# EAGLE board Pro Trinket Keyboard V3.3 (EAGLE 7.3.0)
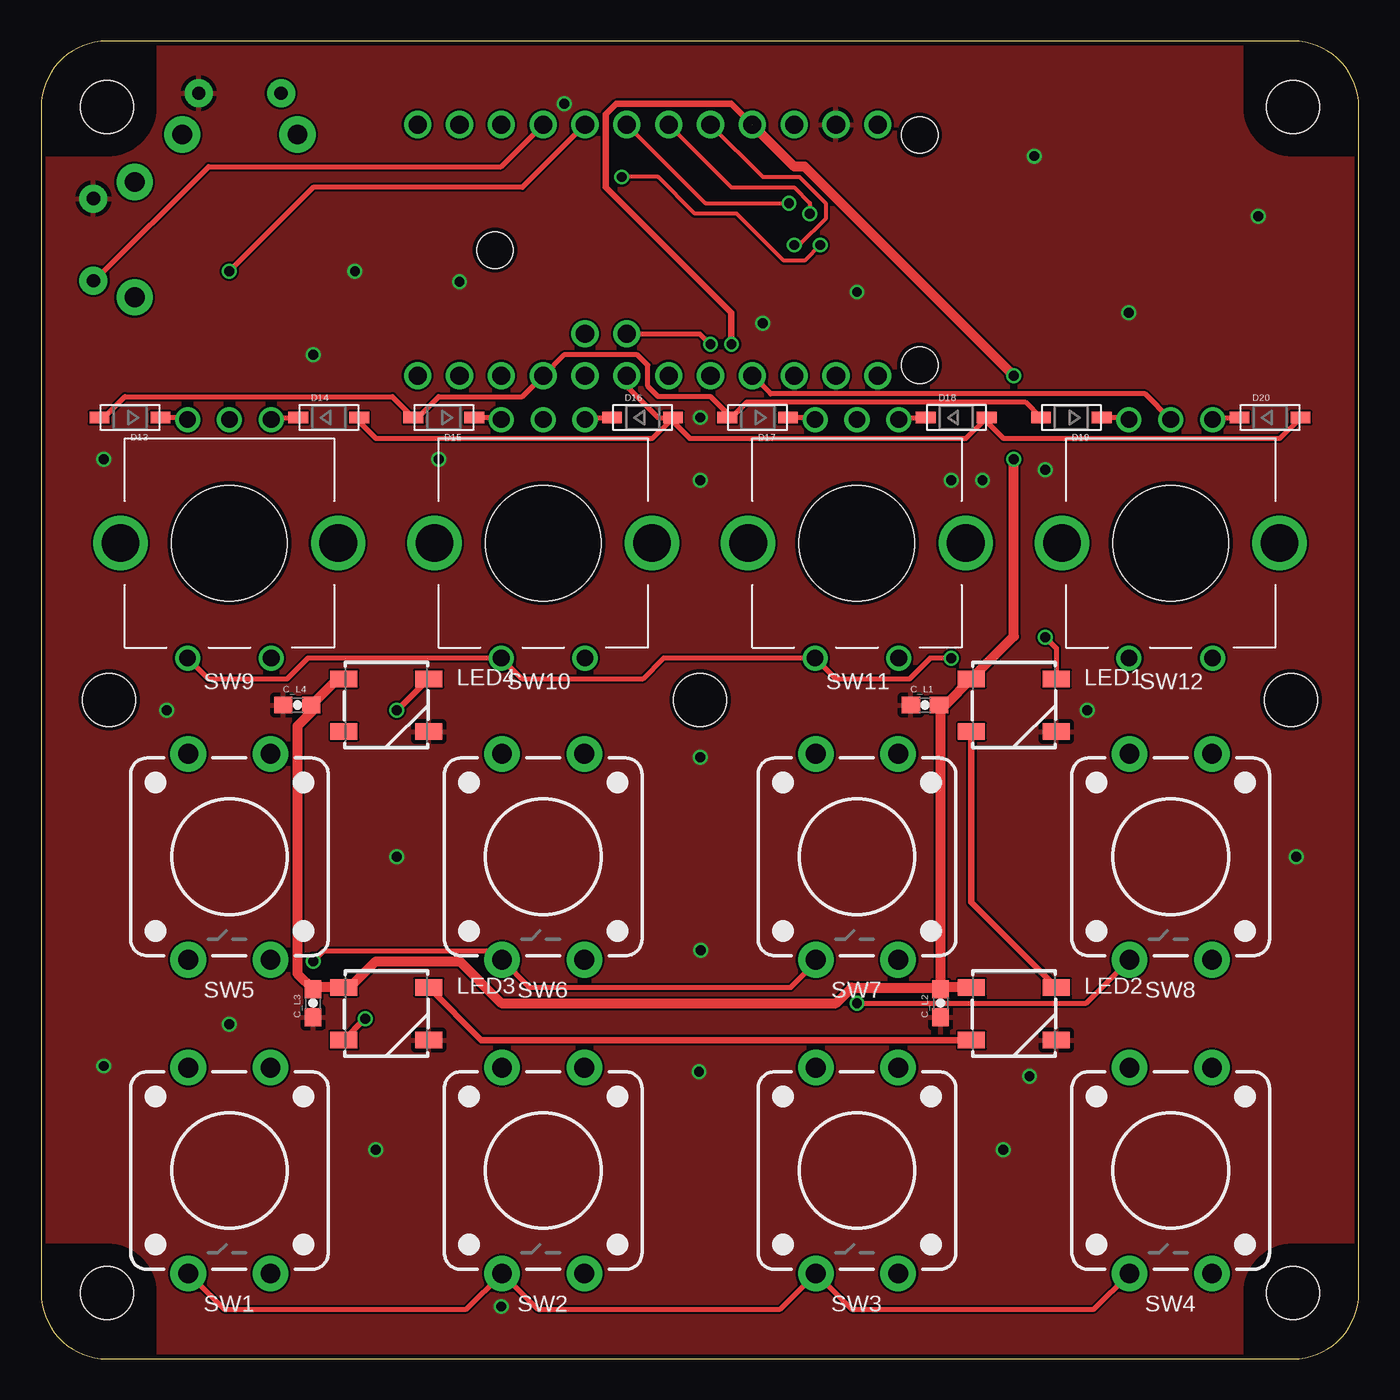
[diagram p0: board, top side]
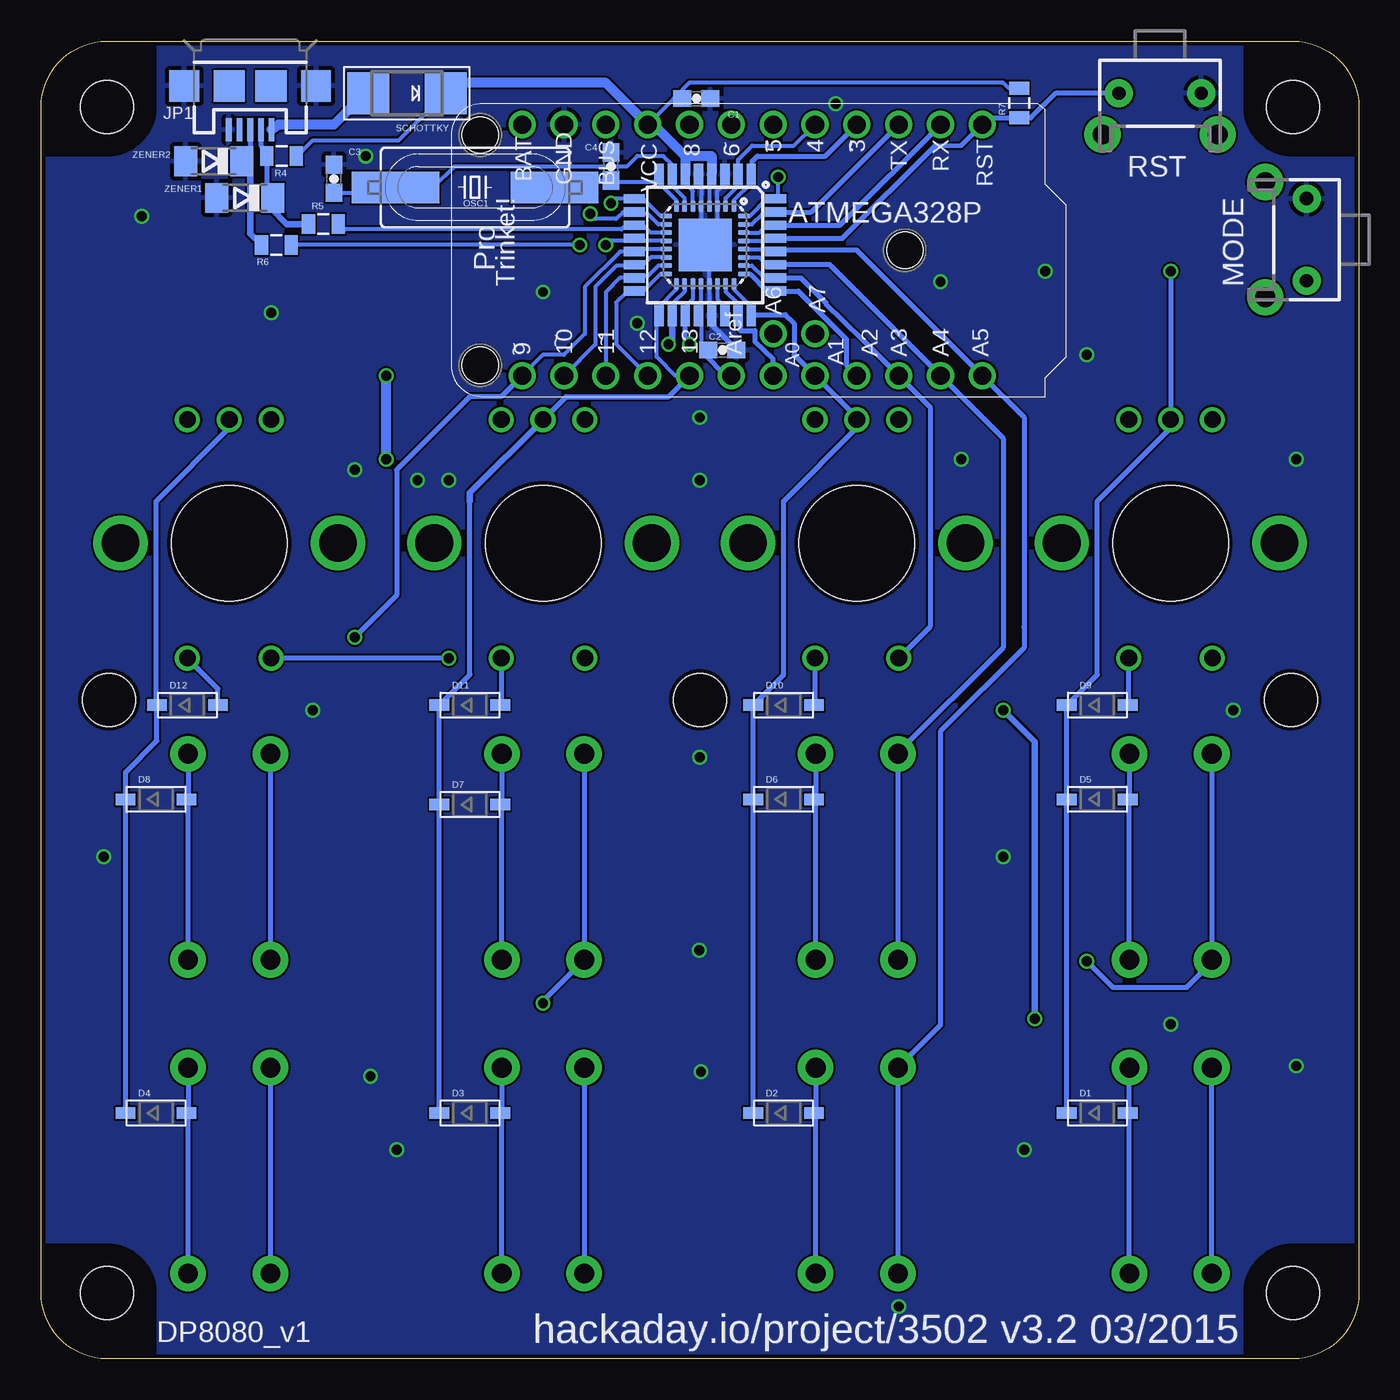
[diagram p1: board, bottom side, seen from below]

Size 80 x 80 mm. Coordinates in mm from the lower left corner, seen from the top.
Copper layers (1*16): Top 0.035mm / dielectric 1.5mm / Bottom 0.035mm
Design rules "dirt_cheap_dirty_boards.v1": minimum track width 5mil, minimum drill 12mil, track to track 5mil, track to pad 5mil, pad to pad 5mil, via to via 5mil, smd to smd 0mil, copper to edge 10mil, drill to drill 10mil, minimum pad ring 10mil, minimum via ring 6mil, stop-mask expansion 2mil, vias tented up to drill 25mil, thermal gap 10mil
Holes 7 mm at 11.43,49.53 30.48,49.53 49.53,49.53 68.58,49.53
Holes 3.2 mm at 40.01,40.01 4.13,40.01 75.88,40.01

## Footprints (pad centres in the part's own frame; a part is rotated, then mirrored left to right if it is on the bottom)
MLF32-PAD = smd 0.7 x 0.3: 1 -2.35,1.75; 2 -2.35,1.25; 3 -2.35,0.75; 4 -2.35,0.25; 5 -2.35,-0.25; 6 -2.35,-0.75; 7 -2.35,-1.25; 8 -2.35,-1.75; 17 2.35,-1.75; 18 2.35,-1.25; 19 2.35,-0.75; 20 2.35,-0.25; 21 2.35,0.25; 22 2.35,0.75; 23 2.35,1.25; 24 2.35,1.75 | smd 0.3 x 0.7: 9 -1.75,-2.35; 10 -1.25,-2.35; 11 -0.75,-2.35; 12 -0.25,-2.35; 13 0.25,-2.35; 14 0.75,-2.35; 15 1.25,-2.35; 16 1.75,-2.35; 25 1.75,2.35; 26 1.25,2.35; 27 0.75,2.35; 28 0.25,2.35; 29 -0.25,2.35; 30 -0.75,2.35; 31 -1.25,2.35; 32 -1.75,2.35 | smd 3.2 x 3.2: PAD 0,0
TQFP32-08 = smd 1.27 x 0.559: 1 -4.293,2.8; 2 -4.293,2; 3 -4.293,1.2; 4 -4.293,0.4; 5 -4.293,-0.4; 6 -4.293,-1.2; 7 -4.293,-2; 8 -4.293,-2.8; 17 4.293,-2.8; 18 4.293,-2; 19 4.293,-1.2; 20 4.293,-0.4; 21 4.293,0.4; 22 4.293,1.2; 23 4.293,2; 24 4.293,2.8 | smd 0.559 x 1.27: 9 -2.8,-4.293; 10 -2,-4.293; 11 -1.2,-4.293; 12 -0.4,-4.293; 13 0.4,-4.293; 14 1.2,-4.293; 15 2,-4.293; 16 2.8,-4.293; 25 2.8,4.293; 26 2,4.293; 27 1.2,4.293; 28 0.4,4.293; 29 -0.4,4.293; 30 -1.2,4.293; 31 -2,4.293; 32 -2.8,4.293
0603-CAP = smd 1.1 x 1: 1 -0.85,0; 2 0.85,0
SOD-123 = smd 1.2 x 0.7: A 1.85,0; C -1.85,0
USB-MICROB = smd 0.35 x 1.4: D+ 0,2.65; D- -0.65,2.65; GND 1.3,2.65; ID 0.65,2.65; VBUS -1.3,2.65 | smd 1.8 x 1.9: MT1 -4,0; MT2 4,0 | smd 1.9 x 1.9: P$1 -1.27,0; P$2 1.27,0
WS2812B = smd 1.651 x 1: 1 -2.577,1.6; 2 -2.577,-1.6; 3 2.577,-1.6; 4 2.577,1.6
TACTILE-PTH-SIDEEZ = drill 0.8 pad 1.7: 1 -2.5,0; 2 2.5,0 | drill 1.2 pad 2.2: ANCHOR1 -3.5,2.5; ANCHOR2 3.5,2.5
HC-49U = smd 5.334 x 1.93: 1 -4.826,0; 2 4.826,0
0805 = smd 0.8 x 1.2: 1 -0.9,0; 2 0.9,0
TACTILE-PTH-12MM = drill 1.2 pad 2.159: 1 6.25,-2.5; 2 -6.25,-2.5; 3 6.25,2.5; 4 -6.25,2.5
SMADIODE = smd 2.54 x 2.54: A 2.349,0; C -2.349,0
ROTARY_ENC_PLAIN = drill 1.016: A 7.493,-2.54; B 7.493,2.54; C 7.493,0; SW+ -6.985,2.54; SW- -6.985,-2.54 | drill 2.286: P$3 0,6.604; P$4 0,-6.604
DP8080_V1 = hole 3.2: 4,4; 76,4; 76,76; 4,76
PROTRINKET = drill 1.1: 3 7.62,2.921; 4 7.62,5.461; 5 7.62,8.001; 6 7.62,10.541; 8 7.62,13.081; 9 -7.62,23.241; 10 -7.62,20.701; 11 -7.62,18.161; 12 -7.62,15.621; 13 -7.62,13.081; A0 -7.62,8.001; A1 -7.62,5.461; A2 -7.62,2.921; A3 -7.62,0.381; A4 -7.62,-2.159; A5 -7.62,-4.699; A6 -5.08,8.001; A7 -5.08,5.461; AREF -7.62,10.541; BAT+ 7.62,23.241; GND 7.62,20.701; RST 7.62,-4.699; RX 7.62,-2.159; TX 7.62,0.381; USB 7.62,18.161; VCC 7.62,15.621 | hole 2.2: -6.985,25.781; 6.985,25.781; 0,0
SOD80C = smd 1.4 x 1.8: A 1.7,0; C -1.7,0

## Placement (x,y rotation side)
ATMEGA328P  [MLF32-PAD]  39.69,67.63 270 bottom
ATMEGA328P_TQFP  [TQFP32-08]  39.69,67.63 270 bottom
C1  10uF  [0603-CAP]  40.23,76.52 180 bottom
C2  0.1uF  [0603-CAP]  38.64,61.25 180 bottom
C3  22pF  [0603-CAP]  62.23,71.65 270 bottom
C4  22pF  [0603-CAP]  45.4,72.39 90 bottom
C_L1  0.1uF  [0603-CAP]  53.66,39.69 0 top
C_L2  0.1uF  [0603-CAP]  54.61,21.59 90 top
C_L3  0.1uF  [0603-CAP]  16.51,21.59 90 top
C_L4  0.1uF  [0603-CAP]  15.56,39.69 0 top
D1  [SOD-123]  15.88,14.92 0 bottom
D2  [SOD-123]  34.92,14.92 0 bottom
D3  [SOD-123]  53.98,14.92 0 bottom
D4  [SOD-123]  73.03,14.92 0 bottom
D5  [SOD-123]  15.88,33.97 0 bottom
D6  [SOD-123]  34.92,33.97 0 bottom
D7  [SOD-123]  53.98,33.66 0 bottom
D8  [SOD-123]  73.03,33.97 0 bottom
D9  [SOD-123]  15.88,39.69 0 bottom
D10  [SOD-123]  34.92,39.69 0 bottom
D11  [SOD-123]  53.98,39.69 0 bottom
D12  [SOD-123]  71.12,39.69 0 bottom
D13  [SOD-123]  5.4,57.15 180 top
D14  [SOD-123]  17.46,57.15 0 top
D15  [SOD-123]  24.45,57.15 180 top
D16  [SOD-123]  36.51,57.15 0 top
D17  [SOD-123]  43.5,57.15 180 top
D18  [SOD-123]  55.56,57.15 0 top
D19  [SOD-123]  62.55,57.15 180 top
D20  [SOD-123]  74.61,57.15 0 top
JP1  USB-MICROB  [USB-MICROB]  67.31,77.28 180 bottom
LED1  [WS2812B]  59.05,39.69 0 top
LED2  [WS2812B]  59.05,20.95 0 top
LED3  [WS2812B]  20.95,20.95 0 top
LED4  [WS2812B]  20.95,39.69 0 top
MODE  [TACTILE-PTH-SIDEEZ]  3.17,67.94 90 bottom
OSC1  16MHz  [HC-49U]  53.66,71.12 180 bottom
R4  1.5k  [0805]  65.41,73.03 0 bottom
R5  68  [0805]  62.87,68.9 0 bottom
R6  68  [0805]  65.72,67.63 0 bottom
R7  10k  [0805]  20.62,76.24 90 bottom
RST  [TACTILE-PTH-SIDEEZ]  12.06,76.83 180 bottom
S1  [TACTILE-PTH-12MM]  11.43,11.43 270 top
S2  [TACTILE-PTH-12MM]  30.48,11.43 270 top
S3  [TACTILE-PTH-12MM]  49.53,11.43 270 top
S4  [TACTILE-PTH-12MM]  68.58,11.43 270 top
S5  [TACTILE-PTH-12MM]  11.43,30.48 270 top
S6  [TACTILE-PTH-12MM]  30.48,30.48 270 top
S7  [TACTILE-PTH-12MM]  49.53,30.48 270 top
S8  [TACTILE-PTH-12MM]  68.58,30.48 270 top
SCHOTTKY  [SMADIODE]  57.78,76.83 180 bottom
SW9  ROTARTY_ENCODER  [ROTARY_ENC_PLAIN]  11.43,49.53 90 top
SW10  ROTARTY_ENCODER  [ROTARY_ENC_PLAIN]  30.48,49.53 90 top
SW11  ROTARTY_ENCODER  [ROTARY_ENC_PLAIN]  49.53,49.53 90 top
SW12  ROTARTY_ENCODER  [ROTARY_ENC_PLAIN]  68.58,49.53 90 top
U$1  [DP8080_V1]  0,0 0 top
U$2  PRO_TRINKET  [PROTRINKET]  27.56,67.32 90 bottom
ZENER1  3.6V  [SOD80C]  67.63,70.48 180 bottom
ZENER2  3.6V  [SOD80C]  69.53,72.71 180 bottom

## Library data of the parts
ATMEGA328P = SparkFun-DigitalIC
ATMEGA328P_TQFP = SparkFun-DigitalIC; PROD_ID: IC-09069
C1 = SparkFun-Capacitors; PROD_ID: CAP-11015
C2-C4 C_L1-C_L4 = SparkFun-Capacitors; PROD_ID: CAP-07876
D1-D20 SCHOTTKY U$2 = adafruit
JP1 = SparkFun-Connectors; PROD_ID: CONN-09505
LED1-LED4 = SparkFun-LED
MODE RST SW9-SW12 = SparkFun-Electromechanical
OSC1 = dp_devices
R4-R7 = SparkFun-Passives
S1-S8 = SparkFun-Electromechanical; PROD_ID: SWCH-09185
U$1 = dp_pcb
ZENER1 ZENER2 = diode

## Nets
A0/D14: ATMEGA328P.23 ATMEGA328P_TQFP.23 D14.A D16.A D18.A D20.A U$2.A0
A1/D15: ATMEGA328P.24 ATMEGA328P_TQFP.24 D2.C D6.C D10.C SW10.C U$2.A1
A2/D16: ATMEGA328P.25 ATMEGA328P_TQFP.25 D13.A D15.A D17.A D19.A U$2.A2
A3/D17: ATMEGA328P.26 ATMEGA328P_TQFP.26 SW9.SW+ SW10.SW+ SW11.SW+ SW12.SW+ U$2.A3
A4/D18: ATMEGA328P.27 ATMEGA328P_TQFP.27 S5.1 S5.2 S6.1 S6.2 S7.1 S7.2 S8.1 S8.2 U$2.A4
A5/D19: ATMEGA328P.28 ATMEGA328P_TQFP.28 S1.1 S1.2 S2.1 S2.2 S3.1 S3.2 S4.1 S4.2 U$2.A5
A6: ATMEGA328P.19 ATMEGA328P_TQFP.19 U$2.A6
A7: ATMEGA328P.22 ATMEGA328P_TQFP.22
AREF: ATMEGA328P.20 ATMEGA328P_TQFP.20 C2.2 U$2.AREF
BAT+: U$2.BAT+
D2/D+: ATMEGA328P.32 ATMEGA328P_TQFP.32 R6.2
D3: ATMEGA328P.1 ATMEGA328P_TQFP.1 MODE.1 U$2.3
D4: ATMEGA328P.2 ATMEGA328P_TQFP.2 D1.C D5.C D9.C SW9.C U$2.4
D5: ATMEGA328P.9 ATMEGA328P_TQFP.9 U$2.5
D6: ATMEGA328P.10 ATMEGA328P_TQFP.10 U$2.6
D7/D-: ATMEGA328P.11 ATMEGA328P_TQFP.11 R5.2
D8: ATMEGA328P.12 ATMEGA328P_TQFP.12 U$2.8
D9: ATMEGA328P.13 ATMEGA328P_TQFP.13 LED1.4 U$2.9
D10: ATMEGA328P.14 ATMEGA328P_TQFP.14 U$2.10
D11: ATMEGA328P.15 ATMEGA328P_TQFP.15 U$2.11
D12: ATMEGA328P.16 ATMEGA328P_TQFP.16 D4.C D8.C D12.C SW12.C U$2.12
D13: ATMEGA328P.17 ATMEGA328P_TQFP.17 D3.C D7.C D11.C SW11.C U$2.13
GND: ATMEGA328P.3 ATMEGA328P.5 ATMEGA328P.21 ATMEGA328P.PAD ATMEGA328P_TQFP.3 ATMEGA328P_TQFP.5 ATMEGA328P_TQFP.21 C1.1 C2.1 C3.1 C4.2 C_L1.1 C_L2.1 C_L3.1 C_L4.1 JP1.GND JP1.MT1 JP1.MT2 LED1.3 LED2.3 LED3.3 LED4.3 MODE.2 RST.1 U$2.GND ZENER1.A ZENER2.A
N$1: LED1.2 LED2.4
N$2: LED2.2 LED3.4
N$3: LED3.2 LED4.4
N$10: JP1.VBUS SCHOTTKY.A
N$11: JP1.D- R4.1 R5.1 ZENER1.C
N$12: JP1.D+ R6.1 ZENER2.C
N$16: D1.A S1.3 S1.4
N$26: D2.A S2.3 S2.4
N$27: D5.A S5.3 S5.4
N$28: D6.A S6.3 S6.4
N$29: D7.A S7.3 S7.4
N$30: D3.A S3.3 S3.4
N$31: D4.A S4.3 S4.4
N$32: D8.A S8.3 S8.4
N$34: D10.A SW10.SW-
N$35: D9.A SW9.SW-
N$36: D11.A SW11.SW-
N$37: D20.C SW12.A
N$38: D19.C SW12.B
N$39: D18.C SW11.A
N$40: D12.A SW12.SW-
N$41: D16.C SW10.A
N$42: D15.C SW10.B
N$43: D14.C SW9.A
N$44: D13.C SW9.B
N$45: D17.C SW11.B
RST: ATMEGA328P.29 ATMEGA328P_TQFP.29 R7.1 RST.2 U$2.RST
RX: ATMEGA328P.30 ATMEGA328P_TQFP.30 U$2.RX
TX: ATMEGA328P.31 ATMEGA328P_TQFP.31 U$2.TX
USB: U$2.USB
VCC: ATMEGA328P.4 ATMEGA328P.6 ATMEGA328P.18 ATMEGA328P_TQFP.4 ATMEGA328P_TQFP.6 ATMEGA328P_TQFP.18 C1.2 C_L1.2 C_L2.2 C_L3.2 C_L4.2 LED1.1 LED2.1 LED3.1 LED4.1 R4.2 R7.2 SCHOTTKY.C U$2.VCC
XTAL1: ATMEGA328P.7 ATMEGA328P_TQFP.7 C3.2 OSC1.2
XTAL2: ATMEGA328P.8 ATMEGA328P_TQFP.8 C4.1 OSC1.1

## Tracks (layer width: path | path; a pad name or v marks a point on that pad's centre or on a via)
A0/D14
  Top 0.305: U$2.A0 35.56,59.06 37.47,57.15 D16.A | D14.A 19.31,56.89 20.32,55.88 37.09,55.88 D16.A | D16.A 38.36,56.89 39.37,55.88 56.14,55.88 D18.A 57.41,56.89 58.42,55.88 75.19,55.88 D20.A
  Bottom 0.254: ATMEGA328P.23 38.44,64.79 37.78,64.14 37.78,63.43 ATMEGA328P_TQFP.23 37.56,63.34
  Bottom 0.305: 37.56,63.34 37.56,62.42 36.67,62.42 36.67,61.75 35.56,60.7 U$2.A0
A1/D15
  Bottom 0.254: ATMEGA328P.24 37.94,64.92 36.83,63.82 36.83,63.39 ATMEGA328P_TQFP.24
  Bottom 0.305: SW10.C 30.48,57.15 | SW10.C 30.48,56.52 34.92,52.07 34.92,41.54 D10.C D6.C D2.C | SW10.C 30.48,57.16 U$2.A1 34.28,60.96 34.29,62.87 34.82,63.39 36.83,63.39
A2/D16
  Top 0.305: D13.A 3.81,57.15 5.08,58.42 21.33,58.42 D15.A 22.86,57.15 24.13,58.42 29.2,58.42 U$2.A2 31.74,60.96 36.2,60.96 36.83,60.33 36.83,59.05 37.47,58.42 40.64,58.42 41.65,57.41 D17.A 41.91,57.15 42.86,58.1 59.74,58.1 D19.A
  Bottom 0.305: ATMEGA328P.25 36.98,65.88 35.88,64.77 35.45,64.77 ATMEGA328P_TQFP.25 34.03,64.83 31.11,61.91 31.11,60.34 U$2.A2
A3/D17  (via drill 0.6)
  Top 0.305: v55.24,42.55 53.98,42.55 52.7,41.27 48.26,41.27 SW11.SW+ 37.78,42.55 36.51,41.27 29.21,41.27 SW10.SW+ 16.19,42.55 14.92,41.27 10.16,41.27 SW9.SW+
  Bottom 0.254: ATMEGA328P.26 36.85,66.38 36.2,65.72 35.49,65.72 ATMEGA328P_TQFP.26
  Bottom 0.305: ATMEGA328P_TQFP.26 33.88,65.63 32.38,64.14 32.35,64.14 32.38,64.1 30.16,61.91 29.2,60.96 U$2.A3 27.94,59.69 26.04,57.78 26.04,44.45 SW10.SW+ | v55.24,42.55 SW12.SW+
A4/D18  (via drill 0.6)
  Top 0.305: v49.53,21.59 63.44,21.59 S8.1 | S7.1 47.03,24.09 45.48,22.54 29.67,22.54 S6.1 27.45,24.77 17.14,24.77 v16.51,24.13
  Bottom 0.254: ATMEGA328P.27 36.4,66.88 35.88,66.36 35.47,66.36 ATMEGA328P_TQFP.27
  Bottom 0.305: S8.2 S8.1 | S7.2 S7.1 49.53,21.73 v49.53,21.59 | S6.1 S6.2 27.98,36.79 21.59,43.18 21.59,55.89 U$2.A4 32.13,66.43 ATMEGA328P_TQFP.27 | S5.2 S5.1 8.93,24.09 10.48,22.54 14.92,22.54 v16.51,24.13
A5/D19
  Top 0.305: S1.1 8.95,5.18 11.11,3.02 25.82,3.02 S2.1 28,5.18 30.16,3.02 44.87,3.02 S3.1 47.05,5.18 49.21,3.02 63.92,3.02 S4.1
  Bottom 0.254: ATMEGA328P.28 35.4,67.38 ATMEGA328P_TQFP.28
  Bottom 0.305: S1.1 S1.2 | S2.1 S2.2 25.4,20.26 25.4,38.1 20.32,43.18 20.32,44.39 20.32,44.45 20.32,57.16 U$2.A5 30.47,67.31 35.31,67.31 ATMEGA328P_TQFP.28 | S3.2 S3.1 | S4.2 S4.1
A6  (via drill 0.6)
  Top 0.305: U$2.A6 40,62.24 v40.64,61.59
  Bottom 0.254: ATMEGA328P.19 40.44,64.34 40.96,63.82 40.96,63.41 ATMEGA328P_TQFP.19
  Bottom 0.305: v40.64,61.59 40.89,61.84 ATMEGA328P_TQFP.19
A7
  Bottom 0.254: ATMEGA328P.22 38.94,64.34 38.42,63.82 38.42,63.41 ATMEGA328P_TQFP.22
AREF
  Bottom 0.254: ATMEGA328P_TQFP.20 39.94,63.34 | 39.94,63.34 ATMEGA328P.20 | 39.94,63.34 39.94,61.73 C2.2 39.69,61.05 39.69,60.96
  Bottom 0.305: U$2.AREF 38.42,59.7 39.69,60.96
D2/D+  (via drill 0.6)
  Top 0.254: v47.31,67.63 46.35,66.67 45.09,66.67 42.23,69.53 39.69,69.53 37.47,71.75 v35.24,71.75
  Bottom 0.254: ATMEGA328P.32 36.98,69.38 35.88,70.48 35.45,70.48 | 35.45,70.48 ATMEGA328P_TQFP.32 | 35.45,70.48 35.24,70.69 v35.24,71.75 | v47.31,67.63 R6.2
D3
  Top 0.305: MODE.1 3.21,65.44 10.16,72.39 27.93,72.39 U$2.3
  Bottom 0.254: ATMEGA328P.1 37.94,70.33 36.83,71.44 36.83,71.86 ATMEGA328P_TQFP.1
  Bottom 0.305: 36.83,71.86 36.83,72.71 36.51,73.03 32.38,73.03 U$2.3
D4  (via drill 0.6)
  Top 0.305: v11.43,66.04 16.51,71.12 29.21,71.12 33.02,74.93 U$2.4
  Bottom 0.254: ATMEGA328P.2 38.44,70.47 37.78,71.12 37.78,71.83 ATMEGA328P_TQFP.2 37.69,72.8 36.83,73.66 34.29,73.66 U$2.4
  Bottom 0.305: D1.C D5.C D9.C 15.88,41.54 15.88,52.07 11.43,56.52 SW9.C v11.43,66.04
D5  (via drill 0.6)
  Top 0.254: U$2.5 40.32,70.17 v45.4,70.17
  Bottom 0.254: ATMEGA328P.9 42.39,69.38 43.5,70.48 43.92,70.48 ATMEGA328P_TQFP.9 45.14,70.43 v45.4,70.17
D6  (via drill 0.6)
  Top 0.254: U$2.6 41.91,71.12 45.72,71.12 46.67,70.17 v46.67,69.53
  Bottom 0.254: ATMEGA328P.10 42.52,68.88 43.18,69.53 43.88,69.53 ATMEGA328P_TQFP.10 44.67,69.63 45.09,69.22 46.35,69.22 v46.67,69.53
D7/D-
  Bottom 0.254: ATMEGA328P.11 42.98,68.38 43.5,68.9 43.91,68.9 ATMEGA328P_TQFP.11 44.52,68.83 44.77,68.58 61.54,68.58 R5.2
D8  (via drill 0.6)
  Top 0.254: U$2.8 43.81,71.75 46.04,71.75 47.62,70.17 47.62,69.22 46.04,67.63 v45.72,67.63
  Bottom 0.254: ATMEGA328P.12 43.98,67.88 | 43.98,67.88 ATMEGA328P_TQFP.12 | 43.98,67.88 45.47,67.88 v45.72,67.63
D9  (via drill 0.6)
  Top 0.305: v60.96,43.81 61.63,43.14 LED1.4
  Bottom 0.254: ATMEGA328P.13 43.98,67.38 ATMEGA328P_TQFP.13 44.85,67.23 46.99,65.09 46.99,62.23 48.26,60.96 49.53,60.96 U$2.9
  Bottom 0.305: U$2.9 52.07,58.42 53.98,58.42 58.42,53.98 58.42,46.35 v60.96,43.81
D10
  Bottom 0.254: ATMEGA328P.14 42.98,66.88 43.5,66.36 43.91,66.36 | 43.91,66.36 ATMEGA328P_TQFP.14 | 43.91,66.36 45.09,66.36 46.35,65.09 46.35,61.6 U$2.10
D11
  Bottom 0.254: ATMEGA328P.15 42.52,66.38 43.18,65.72 43.88,65.72 ATMEGA328P_TQFP.15 44.86,65.63 45.72,64.77 U$2.11
D12
  Top 0.305: SW12.C 67.02,58.58 44.29,58.58 U$2.12
  Bottom 0.254: ATMEGA328P.16 42.39,65.88 43.5,64.77 43.92,64.77 | 43.92,64.77 ATMEGA328P_TQFP.16 | 43.92,64.77 44.45,64.77 45.09,64.14 45.09,61.6 U$2.12
  Bottom 0.305: 68.58,57.15 SW12.C 68.58,56.52 73.03,52.07 73.03,39.74 D12.C 72.97,37.52 74.88,35.62 D8.C D4.C
D13
  Bottom 0.254: ATMEGA328P.17 41.44,64.92 42.55,63.82 42.55,63.39 ATMEGA328P_TQFP.17 42.49,62.95 42.64,62.8 42.64,60.83 41.5,59.69 41.27,59.69 U$2.13
  Bottom 0.305: 53.98,52.07 53.98,41.54 D11.C D7.C D3.C | SW11.C 48.13,58.42 41.91,58.42 U$2.13
  Bottom 0.406: SW11.C 53.98,52.58 53.98,52.07
GND  (via drill 0.6)
  Bottom 0.254: ATMEGA328P_TQFP.5 39.94,71.92 ATMEGA328P.5 39.94,67.88 ATMEGA328P.PAD | ATMEGA328P_TQFP.3 38.42,71.85 38.42,71.44 38.94,70.92 ATMEGA328P.3 38.94,68.38 ATMEGA328P.PAD | ATMEGA328P_TQFP.21 39.44,63.48 ATMEGA328P.21 39.44,67.38 ATMEGA328P.PAD
  Bottom 0.305: 39.37,63.5 39.37,62.87 37.79,61.28 C2.1
  other vias: 43.81,62.87 19.05,66.04 66.04,63.5 63.5,39.37 40.01,36.51 7.62,39.37 24.13,54.61 57.15,53.34 39.94,17.43 58.42,12.7 20.32,12.7 76.2,30.48 3.81,17.78 16.51,60.96 40.04,24.8 27.94,3.17 21.59,30.48 3.81,54.61 60.29,73.03 73.88,69.37 60.96,53.98 55.24,53.34 40.01,57.15 11.43,20.32 25.4,65.41 60.01,17.14 31.75,76.2 49.53,64.77 40.01,53.34
  pour Bottom (rank 6): 0,80.01 80.01,80.01 80.01,0 0,0
  pour Top: 0,80.01 80.01,80.01 80.01,0 0,0
N$1
  Top 0.406: LED1.2 56.48,27.71 LED2.4
N$2
  Top 0.406: LED2.2 26.73,19.36 LED3.4
N$3  (via drill 0.6)
  Top 0.406: LED3.2 19.66,20.64 v19.68,20.64 | v21.59,39.37 21.61,39.37 LED4.4
  Bottom 0.406: v19.68,20.64 19.68,37.47 v21.59,39.37
N$10
  Bottom 0.61: SCHOTTKY.A 60.33,76.83 62.23,74.93 65.58,74.93 JP1.VBUS
N$11
  Bottom 0.305: JP1.D- 66.66,73.7 R4.1 66.31,71.33 66.16,71.19 ZENER1.C
  Bottom 0.406: R5.1 65.09,68.9 66.04,69.85 66.04,70.37 ZENER1.C
N$12
  Bottom 0.305: JP1.D+ 67.31,73.14 ZENER2.C 67.31,72.91
  Bottom 0.406: 67.31,72.91 67.31,68.31 R6.1
N$16
  Bottom 0.305: S1.3 13.93,14.83 D1.A 13.93,15.02 S1.4
N$26
  Bottom 0.305: S2.3 32.98,14.83 D2.A 32.98,15.02 S2.4
N$27
  Bottom 0.305: S5.3 13.93,33.88 D5.A 13.93,34.07 S5.4
N$28
  Bottom 0.305: S6.3 32.98,33.88 D6.A 32.98,34.07 S6.4
N$29
  Bottom 0.305: S7.3 52.03,33.56 D7.A 52.03,33.75 S7.4
N$30
  Bottom 0.305: S3.3 52.03,14.83 D3.A 52.03,15.02 S3.4
N$31
  Bottom 0.305: S4.3 71.08,14.83 D4.A 71.08,15.02 S4.4
N$32
  Bottom 0.305: S8.3 71.08,33.88 D8.A 71.08,34.07 S8.4
N$34
  Bottom 0.305: SW10.SW- 33.02,39.74 D10.A
N$35
  Bottom 0.305: D9.A 13.97,39.74 SW9.SW-
N$36
  Bottom 0.305: SW11.SW- 52.07,39.74 D11.A
N$37
  Top 0.305: SW12.A 71.25,57.15 D20.C
N$38
  Top 0.305: SW12.B 65.91,57.15 D19.C
N$39
  Top 0.305: SW11.A 52.2,57.15 D18.C
N$40
  Bottom 0.305: D12.A 69.27,40.7 SW12.SW-
N$41
  Top 0.305: SW10.A 33.15,57.15 D16.C
N$42
  Top 0.305: SW10.B 27.81,57.15 D15.C
N$43
  Top 0.305: SW9.A 14.1,57.15 D14.C
N$44
  Top 0.305: SW9.B 8.76,57.15 D13.C
N$45
  Top 0.305: SW11.B 46.86,57.15 D17.C
RST
  Bottom 0.254: ATMEGA328P.29 35.4,67.88 ATMEGA328P_TQFP.29
  Bottom 0.305: RST.2 18.41,76.83 19.91,75.34 R7.1 22.45,75.34 U$2.RST 24.13,73.67 25.72,73.66 31.35,68.03 ATMEGA328P_TQFP.29
RX
  Bottom 0.254: ATMEGA328P.30 36.4,68.38 35.88,68.9 35.47,68.9 ATMEGA328P_TQFP.30
  Bottom 0.305: ATMEGA328P_TQFP.30 31.51,68.83 U$2.RX
TX
  Bottom 0.254: ATMEGA328P.31 36.85,68.88 36.2,69.53 35.49,69.53 ATMEGA328P_TQFP.31
  Bottom 0.305: ATMEGA328P_TQFP.31 33.25,69.63 U$2.TX
VCC  (via drill 0.6)  (1 unrouted)
  Top 0.406: U$2.VCC 41.91,76.2 34.92,76.2 34.29,75.56 34.29,71.12 41.91,63.5 v41.91,61.59
  Top 0.61: C_L2.2 54.61,39.59 C_L1.2 54.88,39.69 LED1.1 59.05,43.86 v59.05,54.61 | LED2.1 54.73,22.55 C_L2.2 | C_L2.2 54.51,22.54 49.21,22.54 48.26,21.59 27.94,21.59 25.4,24.13 20.32,24.13 18.75,22.55 LED3.1 16.62,22.55 C_L3.2 15.56,23.39 15.56,38.42 16.51,39.37 16.51,39.59 C_L4.2 18.01,41.29 LED4.1 | v59.05,59.69 46.35,72.39 45.72,72.39 U$2.VCC
  Bottom 0.254: ATMEGA328P_TQFP.4 39.44,71.92 ATMEGA328P.4 | ATMEGA328P.6 40.44,70.92 40.96,71.44 40.96,71.85 ATMEGA328P_TQFP.6 | ATMEGA328P.18 40.94,64.79 41.59,64.14 41.59,63.43 ATMEGA328P_TQFP.18 | R4.2 64.14,73.34 63.5,73.98 58.29,73.98 SCHOTTKY.C | R7.2 21.26,77.14 21.59,77.47 40.65,77.46 41.08,77.04 C1.2 41.6,76.52 U$2.VCC
  Bottom 0.406: ATMEGA328P_TQFP.18 41.69,61.82 v41.91,61.59
  Bottom 0.61: 40.89,73.03 39.29,73.03 ATMEGA328P_TQFP.4 | 40.89,73.03 ATMEGA328P_TQFP.6 | 40.89,73.03 42.8,74.94 U$2.VCC 45.72,77.47 54.8,77.47 SCHOTTKY.C | v59.05,54.61 v59.05,59.69
XTAL1
  Bottom 0.254: ATMEGA328P.7 40.94,70.47 41.59,71.12 41.59,71.83 ATMEGA328P_TQFP.7 41.69,72.48 42.23,73.03 43.81,73.03 44.45,72.39 54.93,72.39 56.2,71.12 OSC1.2 58.81,70.8 C3.2
XTAL2
  Bottom 0.254: ATMEGA328P.8 41.44,70.33 42.55,71.44 | 42.55,71.44 42.55,71.86 ATMEGA328P_TQFP.8 | 42.55,71.44 45.3,71.44 C4.1 48.41,71.54 OSC1.1

## Text on the board
tNames: SW5 | SW6 | SW7 | SW8 | SW1 | SW2 | SW3 | SW4
bNames: hackaday.io/project/3502 v3.2 03/2015